# EAGLE board Board_1 (EAGLE 9.1.0)
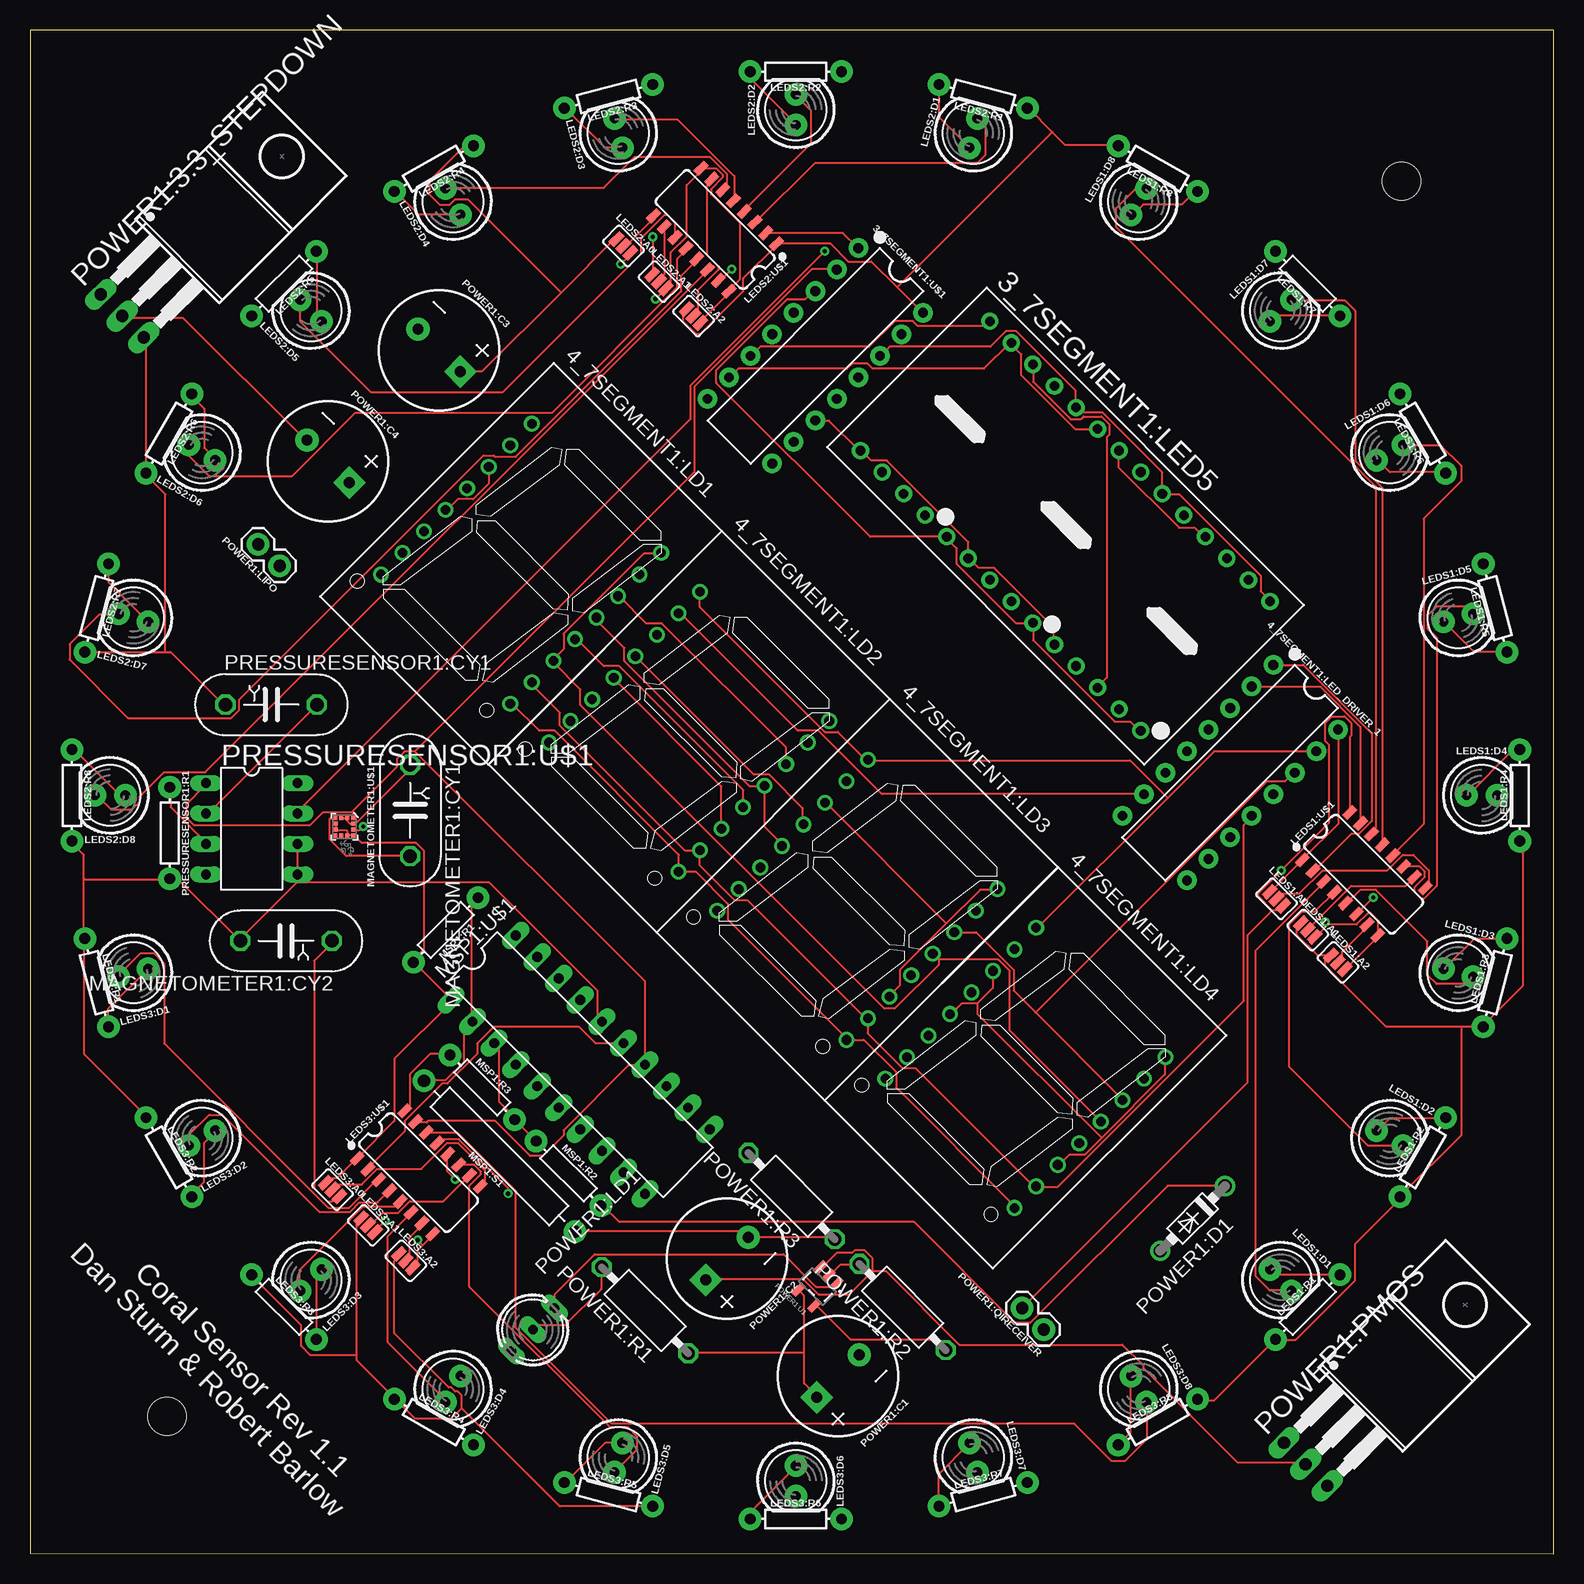
[diagram p0: board, top side]
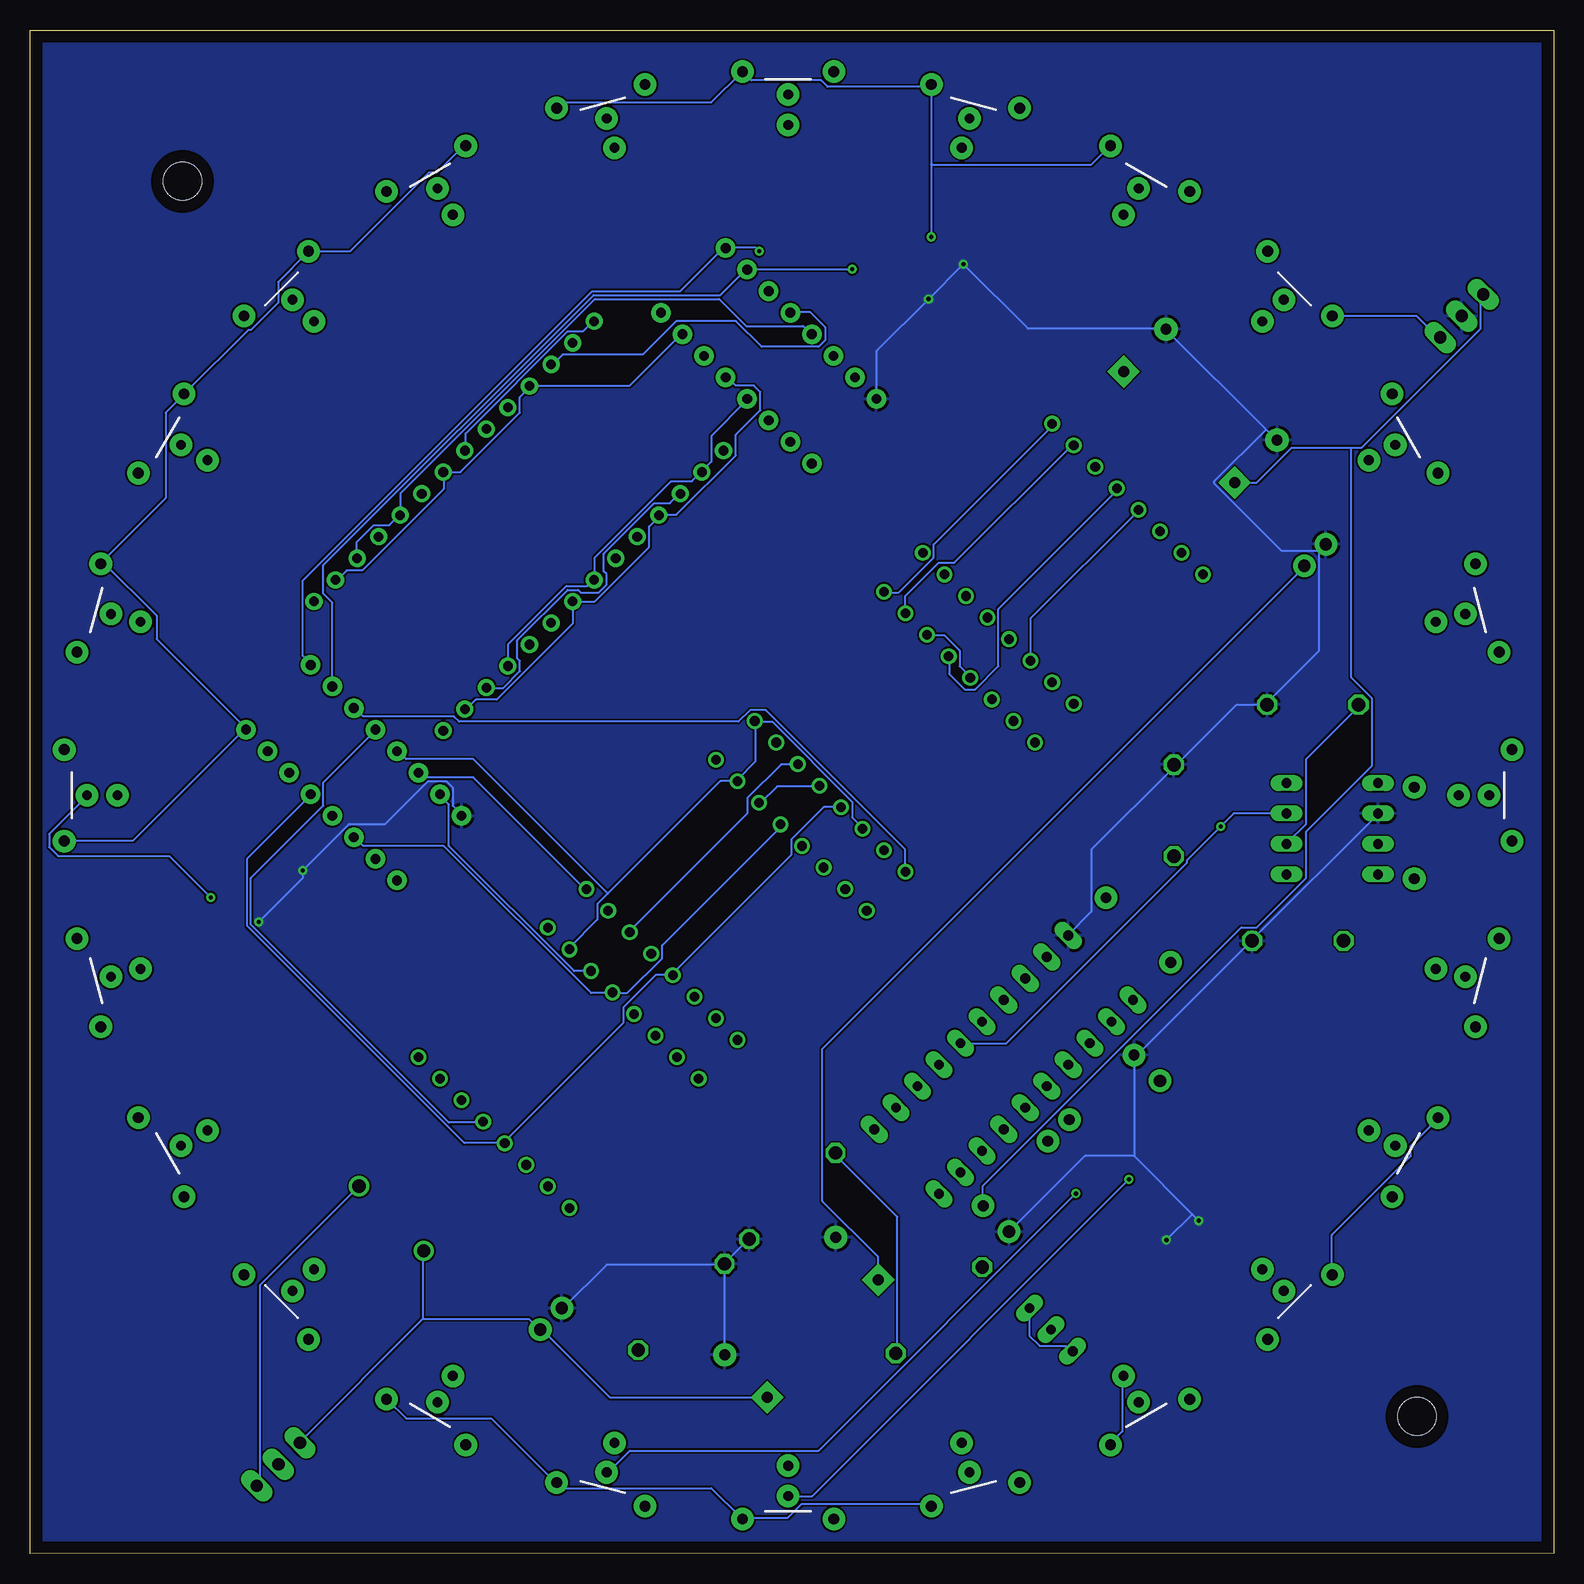
[diagram p1: board, bottom side, seen from below]

Size 127 x 127 mm. Coordinates in mm from the lower left corner, seen from the top.
Outline: 0,0 127,0 127,127 0,127 0,0
Copper layers (1*16): Top 0.035mm / dielectric 1.5mm / Bottom 0.035mm
Design rules "default *": minimum track width 6mil, minimum drill 0.35mm, track to track 6mil, track to pad 6mil, pad to pad 5mil, via to via 6mil, smd to smd 6mil, copper to edge 40mil, drill to drill 6mil, minimum pad ring 10mil, minimum via ring 8mil, stop-mask expansion 4mil, vias tented up to drill 0mil, thermal gap 10mil
Holes 3.17 mm at 114.29,114.39 11.42,11.43

## Footprints (pad centres in the part's own frame; a part is rotated, then mirrored left to right if it is on the bottom)
BA/BC56 = drill 0.8 pad 1.422: 1 -16.51,-7.62; 2 -13.97,-7.62; 3 -11.43,-7.62; 4 -8.89,-7.62; 5 -6.35,-7.62; 6 -3.81,-7.62; 7 -1.27,-7.62; 8 1.27,-7.62; 9 3.81,-7.62; 10 6.35,-7.62; 11 8.89,-7.62; 12 11.43,-7.62; 13 13.97,-7.62; 14 16.51,-7.62; 15 16.51,7.62; 16 13.97,7.62; 17 11.43,7.62; 18 8.89,7.62; 19 6.35,7.62; 20 3.81,7.62; 21 1.27,7.62; 22 -1.27,7.62; 23 -3.81,7.62; 24 -6.35,7.62; 25 -8.89,7.62; 26 -11.43,7.62; 27 -13.97,7.62; 28 -16.51,7.62
DIP16 = drill 0.813 pad 1.626: 1 -8.89,-3.81; 2 -6.35,-3.81; 3 -3.81,-3.81; 4 -1.27,-3.81; 5 1.27,-3.81; 6 3.81,-3.81; 7 6.35,-3.81; 8 8.89,-3.81; 9 8.89,3.81; 10 6.35,3.81; 11 3.81,3.81; 12 1.27,3.81; 13 -1.27,3.81; 14 -3.81,3.81; 15 -6.35,3.81; 16 -8.89,3.81
SA08 = drill 0.8 pad 1.27: 1 -7.62,8.89; 2 -7.62,6.35; 3 -7.62,3.81; 4 -7.62,1.27; 5 -7.62,-1.27; 6 -7.62,-3.81; 7 -7.62,-6.35; 8 -7.62,-8.89; 9 7.62,-8.89; 10 7.62,-6.35; 11 7.62,-3.81; 12 7.62,-1.27; 13 7.62,1.27; 14 7.62,3.81; 15 7.62,6.35; 16 7.62,8.89
SMT-JUMPER_3_NO_SILK = smd 0.635 x 1.27: 1 -0.813,0; 2 0,0; 3 0.813,0
LED_5MM = drill 0.813 pad 1.88: A -1.27,0; K 1.27,0
AXIAL-0.3 = drill 0.9 pad 1.88: P$1 -3.81,0; P$2 3.81,0
SO16 = smd 0.6 x 1.2: 1 -4.445,-2.8; 2 -3.175,-2.8; 3 -1.905,-2.8; 4 -0.635,-2.8; 5 0.635,-2.8; 6 1.905,-2.8; 7 3.175,-2.8; 8 4.445,-2.8; 9 4.445,2.8; 10 3.175,2.8; 11 1.905,2.8; 12 0.635,2.8; 13 -0.635,2.8; 14 -1.905,2.8; 15 -3.175,2.8; 16 -4.445,2.8
YC7B5 = drill 1.118 octagon: 1 -3.81,0; 2 3.81,0
LGA-12 = smd 0.375 x 0.35: 1 -0.75,0.75; 2 -0.75,0.25; 3 -0.75,-0.25; 4 -0.75,-0.75; 7 0.75,-0.75; 8 0.75,-0.25; 9 0.75,0.25; 10 0.75,0.75 | smd 0.35 x 0.375: 5 -0.25,-0.75; 6 0.25,-0.75; 11 0.25,0.75; 12 -0.25,0.75
REED_SWITCH_GLASS = drill 1.016 pad 1.88: P$1 -8.89,0; P$2 8.89,0
DIL20 = drill 0.813 long: 1 -11.43,-3.81; 2 -8.89,-3.81; 3 -6.35,-3.81; 4 -3.81,-3.81; 5 -1.27,-3.81; 6 1.27,-3.81; 7 3.81,-3.81; 8 6.35,-3.81; 9 8.89,-3.81; 10 11.43,-3.81; 11 11.43,3.81; 12 8.89,3.81; 13 6.35,3.81; 14 3.81,3.81; 15 1.27,3.81; 16 -1.27,3.81; 17 -3.81,3.81; 18 -6.35,3.81; 19 -8.89,3.81; 20 -11.43,3.81
T03B = drill 1.016 long: 1 -2.54,-11.43; 2 0,-11.43; 3 2.54,-11.43
CPOL-RADIAL-5MM-10MM = drill 0.9 pad 1.93 square: + 2.5,0 | drill 0.9 pad 1.93: - -2.5,0
DO41-7.6 = drill 1.1 pad 1.7: A 3.81,0; C -3.81,0
DUOLED-A-5MM = drill 0.813 long: A 0,0; CR 2.54,0; CX -2.54,0
1X02 = drill 1.016 pad 1.88: 1 0,0; 2 2.54,0
VMTA55 = drill 1.1 octagon: 1 -5.08,0; 2 5.08,0
SOT23-5 = smd 0.55 x 1.2: 1 -0.95,-1.3; 2 0,-1.3; 3 0.95,-1.3; 4 0.95,1.3; 5 -0.95,1.3
DIL8 = drill 0.813 long: 1 -3.81,-3.81; 2 -1.27,-3.81; 3 1.27,-3.81; 4 3.81,-3.81; 5 3.81,3.81; 6 1.27,3.81; 7 -1.27,3.81; 8 -3.81,3.81

## Placement (x,y rotation side)
3_7SEGMENT1:LED5  BA56-11EWA  [BA/BC56]  86.27,85.65 315 top
3_7SEGMENT1:U$1  MAX6958BAPE+  [DIP16]  65.44,99.84 225 top
4_7SEGMENT1:LD1  SA08-11  [SA08]  40.92,82.51 315 top
4_7SEGMENT1:LD2  SA08-11  [SA08]  54.93,68.5 315 top
4_7SEGMENT1:LD3  SA08-11  [SA08]  68.94,54.49 315 top
4_7SEGMENT1:LD4  SA08-11  [SA08]  82.95,40.48 315 top
4_7SEGMENT1:LED_DRIVER_1  [DIP16]  100.01,65.09 225 top
LEDS1:A0  [SMT-JUMPER_3_NO_SILK]  103.87,54.58 315 top
LEDS1:A1  [SMT-JUMPER_3_NO_SILK]  106.48,51.98 315 top
LEDS1:A2  [SMT-JUMPER_3_NO_SILK]  108.99,49.28 315 top
LEDS1:D1  [LED_5MM]  104.23,22.79 315 top
LEDS1:D2  [LED_5MM]  113.32,34.63 330 top
LEDS1:D3  [LED_5MM]  119.02,48.41 345 top
LEDS1:D4  [LED_5MM]  120.97,63.2 0 top
LEDS1:D5  [LED_5MM]  119.02,77.99 15 top
LEDS1:D6  [LED_5MM]  113.32,91.78 30 top
LEDS1:D7  [LED_5MM]  104.23,103.61 45 top
LEDS1:D8  [LED_5MM]  92.4,112.69 60 top
LEDS1:R1  100  [AXIAL-0.3]  106.48,20.55 45 top
LEDS1:R2  100  [AXIAL-0.3]  116.07,33.04 60 top
LEDS1:R3  100  [AXIAL-0.3]  122.09,47.59 75 top
LEDS1:R4  100  [AXIAL-0.3]  124.15,63.2 90 top
LEDS1:R5  100  [AXIAL-0.3]  122.09,78.81 105 top
LEDS1:R6  100  [AXIAL-0.3]  116.07,93.36 120 top
LEDS1:R7  100  [AXIAL-0.3]  106.48,105.86 135 top
LEDS1:R8  100  [AXIAL-0.3]  93.98,115.44 150 top
LEDS1:U$1  TPIC2810D  [SO16]  111.15,56.65 315 top
LEDS2:A0  [SMT-JUMPER_3_NO_SILK]  49.45,109 315 top
LEDS2:A1  [SMT-JUMPER_3_NO_SILK]  52.42,106.04 315 top
LEDS2:A2  [SMT-JUMPER_3_NO_SILK]  55.29,103.16 315 top
LEDS2:D1  [LED_5MM]  78.61,118.4 75 top
LEDS2:D2  [LED_5MM]  63.82,120.35 90 top
LEDS2:D3  [LED_5MM]  49.03,118.4 105 top
LEDS2:D4  [LED_5MM]  35.25,112.69 120 top
LEDS2:D5  [LED_5MM]  23.41,103.61 135 top
LEDS2:D6  [LED_5MM]  14.33,91.78 150 top
LEDS2:D7  [LED_5MM]  8.62,77.99 165 top
LEDS2:D8  [LED_5MM]  6.67,63.2 180 top
LEDS2:R1  100  [AXIAL-0.3]  79.44,121.47 165 top
LEDS2:R2  100  [AXIAL-0.3]  63.82,123.53 180 top
LEDS2:R3  100  [AXIAL-0.3]  48.21,121.47 195 top
LEDS2:R4  100  [AXIAL-0.3]  33.66,115.44 210 top
LEDS2:R5  100  [AXIAL-0.3]  21.17,105.86 225 top
LEDS2:R6  100  [AXIAL-0.3]  11.58,93.36 240 top
LEDS2:R7  100  [AXIAL-0.3]  5.55,78.81 255 top
LEDS2:R8  100  [AXIAL-0.3]  3.5,63.2 270 top
LEDS2:U$1  TPIC2810D  [SO16]  57.09,110.35 135 top
LEDS3:A0  [SMT-JUMPER_3_NO_SILK]  25.21,30.33 315 top
LEDS3:A1  [SMT-JUMPER_3_NO_SILK]  28.17,27.37 315 top
LEDS3:A2  [SMT-JUMPER_3_NO_SILK]  31.31,24.41 315 top
LEDS3:D1  [LED_5MM]  8.62,48.41 195 top
LEDS3:D2  [LED_5MM]  14.33,34.63 210 top
LEDS3:D3  [LED_5MM]  23.41,22.79 225 top
LEDS3:D4  [LED_5MM]  35.25,13.71 240 top
LEDS3:D5  [LED_5MM]  49.03,8 255 top
LEDS3:D6  [LED_5MM]  63.82,6.05 270 top
LEDS3:D7  [LED_5MM]  78.61,8 285 top
LEDS3:D8  [LED_5MM]  92.4,13.71 300 top
LEDS3:R1  100  [AXIAL-0.3]  5.55,47.59 285 top
LEDS3:R2  100  [AXIAL-0.3]  11.58,33.04 300 top
LEDS3:R3  100  [AXIAL-0.3]  21.17,20.55 315 top
LEDS3:R4  100  [AXIAL-0.3]  33.66,10.96 330 top
LEDS3:R5  100  [AXIAL-0.3]  48.21,4.93 345 top
LEDS3:R6  100  [AXIAL-0.3]  63.82,2.88 0 top
LEDS3:R7  100  [AXIAL-0.3]  79.44,4.93 15 top
LEDS3:R8  100  [AXIAL-0.3]  93.98,10.96 30 top
LEDS3:U$1  TPIC2810D  [SO16]  32.39,31.77 315 top
MAGNETOMETER1:CY1  100nF  [YC7B5]  31.67,61.94 270 top
MAGNETOMETER1:CY2  100nF  [YC7B5]  21.35,51.08 180 top
MAGNETOMETER1:U$1  [LGA-12]  26.2,60.6 270 top
MSP1:R1  100K  [AXIAL-0.3]  34.64,51.98 225 top
MSP1:R2  560k  [AXIAL-0.3]  44.87,31.68 315 top
MSP1:R3  820k  [AXIAL-0.3]  37.69,38.86 315 top
MSP1:S1  REED_SWITCH-PTH-GLASS  [REED_SWITCH_GLASS]  39.13,33.12 135 top
MSP1:U$1  MSP430G2452IN20  [DIL20]  45.86,40.75 315 top
POWER1:3.3_STEPDOWN  MCP1826S  [T03B]  15.78,111.25 315 top
POWER1:C1  4.7uF  [CPOL-RADIAL-5MM-10MM]  67.32,14.8 225 top
POWER1:C2  4.7uF  [CPOL-RADIAL-5MM-10MM]  58.07,24.59 225 top
POWER1:C3  1uF  [CPOL-RADIAL-5MM-10MM]  34.1,100.29 315 top
POWER1:C4  1uF  [CPOL-RADIAL-5MM-10MM]  24.85,91.04 315 top
POWER1:D1  1N5817-B  [DO41-7.6]  96.88,27.92 225 top
POWER1:LD1  [DUOLED-A-5MM]  41.91,18.66 45 top
POWER1:LIPO  [1X02]  20.81,82.33 135 top
POWER1:PMOS  IPP80P03P4L-04  [T03B]  114.38,15.52 315 top
POWER1:QIRECEIVER  [1X02]  84.48,18.66 135 top
POWER1:R1  470  [VMTA55]  51.25,20.28 135 top
POWER1:R2  2K  [VMTA55]  72.71,20.55 135 top
POWER1:R3  100K  [VMTA55]  63.46,29.79 135 top
POWER1:U1  MCP73831  [SOT23-5]  65.62,22.25 135 top
PRESSURESENSOR1:CY1  [YC7B5]  20.1,70.76 0 top
PRESSURESENSOR1:R1  10k  [AXIAL-0.3]  11.65,60.06 270 top
PRESSURESENSOR1:U$1  MS5803-14BA  [DIL8]  18.47,60.42 270 top

## Library data of the parts
3_7SEGMENT1:LED5 = display-kingbright; OC_FARNELL: unknown; OC_NEWARK: unknown
3_7SEGMENT1:U$1 MAGNETOMETER1:U$1 POWER1:3.3_STEPDOWN POWER1:PMOS = LED Driver
4_7SEGMENT1:LD1-4_7SEGMENT1:LD4 POWER1:LD1 = led
4_7SEGMENT1:LED_DRIVER_1 = UnderwaterSensorProject2
LEDS1:A0 LEDS1:A1 LEDS1:A2 LEDS2:A0 LEDS2:A1 LEDS2:A2 LEDS3:A0 LEDS3:A1 LEDS3:A2 = SparkFun-Jumpers
LEDS1:D1-LEDS1:D8 LEDS2:D1-LEDS2:D8 LEDS3:D1-LEDS3:D8 = SparkFun-LED
LEDS1:R1-LEDS1:R8 LEDS2:R1-LEDS2:R8 LEDS3:R1-LEDS3:R8 MSP1:R1 = SparkFun-Resistors; PROD_ID: RES-12181
LEDS1:U$1 LEDS2:U$1 LEDS3:U$1 MSP1:U$1 PRESSURESENSOR1:U$1 = UnderwaterSensorProject
MAGNETOMETER1:CY1 MAGNETOMETER1:CY2 PRESSURESENSOR1:CY1 = rcl; SPICEPREFIX: C
MSP1:R2 MSP1:R3 = SparkFun-Resistors; PROD_ID: RES-12184
MSP1:S1 = SparkFun-Switches; PROD_ID: SWCH-09282; SF_SKU: COM-08642
POWER1:C1-POWER1:C4 = SparkFun-Capacitors; PROD_ID: CAP-09538
POWER1:D1 = diode
POWER1:LIPO POWER1:QIRECEIVER = SparkFun-Connectors
POWER1:R1-POWER1:R3 = rcl
POWER1:U1 = SparkFun-IC-Power; PROD_ID: IC-09995
PRESSURESENSOR1:R1 = SparkFun-Resistors; PROD_ID: RES-09435

## Nets
3.3V: 3_7SEGMENT1:U$1.16 4_7SEGMENT1:LED_DRIVER_1.16 LEDS1:A0.1 LEDS1:A1.1 LEDS1:A2.1 LEDS1:R1.P$1 LEDS1:R2.P$1 LEDS1:R3.P$1 LEDS1:R4.P$1 LEDS1:R5.P$2 LEDS1:R6.P$2 LEDS1:R7.P$2 LEDS1:R8.P$2 LEDS1:U$1.1 LEDS2:A0.1 LEDS2:A1.1 LEDS2:A2.1 LEDS2:R1.P$1 LEDS2:R2.P$1 LEDS2:R3.P$1 LEDS2:R4.P$1 LEDS2:R5.P$2 LEDS2:R6.P$2 LEDS2:R7.P$2 LEDS2:R8.P$2 LEDS2:U$1.1 LEDS3:A0.1 LEDS3:A1.1 LEDS3:A2.1 LEDS3:R1.P$1 LEDS3:R2.P$1 LEDS3:R3.P$1 LEDS3:R4.P$1 LEDS3:R5.P$2 LEDS3:R6.P$2 LEDS3:R7.P$2 LEDS3:R8.P$2 LEDS3:U$1.1 MAGNETOMETER1:CY2.2 MAGNETOMETER1:U$1.5 MAGNETOMETER1:U$1.6 MAGNETOMETER1:U$1.9 MAGNETOMETER1:U$1.10 MSP1:R1.P$2 MSP1:U$1.1 MSP1:U$1.16 POWER1:3.3_STEPDOWN.3 POWER1:C3.+ PRESSURESENSOR1:CY1.1 PRESSURESENSOR1:R1.P$2 PRESSURESENSOR1:U$1.5 PRESSURESENSOR1:U$1.6
3_7SEGMENT1:N$1: 3_7SEGMENT1:LED5.3 3_7SEGMENT1:LED5.12 3_7SEGMENT1:LED5.26 3_7SEGMENT1:U$1.4
3_7SEGMENT1:N$2: 3_7SEGMENT1:LED5.5 3_7SEGMENT1:LED5.9 3_7SEGMENT1:LED5.14 3_7SEGMENT1:U$1.3
3_7SEGMENT1:N$8: 3_7SEGMENT1:LED5.16 3_7SEGMENT1:LED5.21 3_7SEGMENT1:LED5.25 3_7SEGMENT1:U$1.15
3_7SEGMENT1:N$9: 3_7SEGMENT1:LED5.15 3_7SEGMENT1:LED5.20 3_7SEGMENT1:LED5.24 3_7SEGMENT1:U$1.14
3_7SEGMENT1:N$10: 3_7SEGMENT1:LED5.4 3_7SEGMENT1:LED5.8 3_7SEGMENT1:LED5.13 3_7SEGMENT1:U$1.13
3_7SEGMENT1:N$11: 3_7SEGMENT1:LED5.2 3_7SEGMENT1:LED5.7 3_7SEGMENT1:LED5.11 3_7SEGMENT1:U$1.12
3_7SEGMENT1:N$26: 3_7SEGMENT1:LED5.1 3_7SEGMENT1:LED5.6 3_7SEGMENT1:LED5.10 3_7SEGMENT1:U$1.11
3_7SEGMENT1:N$28: 3_7SEGMENT1:LED5.17 3_7SEGMENT1:LED5.19 3_7SEGMENT1:U$1.5
3_7SEGMENT1:N$29: 3_7SEGMENT1:LED5.23 3_7SEGMENT1:LED5.27 3_7SEGMENT1:U$1.7
3_7SEGMENT1:N$30: 3_7SEGMENT1:LED5.18 3_7SEGMENT1:LED5.22 3_7SEGMENT1:LED5.28 3_7SEGMENT1:U$1.6
4_7SEGMENT1:N$1: 4_7SEGMENT1:LD1.1 4_7SEGMENT1:LD2.1 4_7SEGMENT1:LD3.1 4_7SEGMENT1:LD4.1 4_7SEGMENT1:LED_DRIVER_1.15
4_7SEGMENT1:N$2: 4_7SEGMENT1:LD1.14 4_7SEGMENT1:LD2.14 4_7SEGMENT1:LD3.14 4_7SEGMENT1:LD4.14 4_7SEGMENT1:LED_DRIVER_1.14
4_7SEGMENT1:N$3: 4_7SEGMENT1:LD1.12 4_7SEGMENT1:LD2.12 4_7SEGMENT1:LD3.12 4_7SEGMENT1:LD4.12 4_7SEGMENT1:LED_DRIVER_1.13
4_7SEGMENT1:N$4: 4_7SEGMENT1:LD1.10 4_7SEGMENT1:LD2.10 4_7SEGMENT1:LD3.10 4_7SEGMENT1:LD4.10 4_7SEGMENT1:LED_DRIVER_1.12
4_7SEGMENT1:N$5: 4_7SEGMENT1:LD1.4 4_7SEGMENT1:LD2.4 4_7SEGMENT1:LD3.4 4_7SEGMENT1:LD4.4 4_7SEGMENT1:LED_DRIVER_1.11
4_7SEGMENT1:N$6: 4_7SEGMENT1:LD1.3 4_7SEGMENT1:LD1.5 4_7SEGMENT1:LD1.11 4_7SEGMENT1:LD1.16 4_7SEGMENT1:LD3.13 4_7SEGMENT1:LD4.13 4_7SEGMENT1:LED_DRIVER_1.4
4_7SEGMENT1:N$7: 4_7SEGMENT1:LD1.9 4_7SEGMENT1:LD2.9 4_7SEGMENT1:LD3.9 4_7SEGMENT1:LD4.9 4_7SEGMENT1:LED_DRIVER_1.3
4_7SEGMENT1:N$9: 4_7SEGMENT1:LD1.2 4_7SEGMENT1:LD2.2 4_7SEGMENT1:LD4.3 4_7SEGMENT1:LD4.5 4_7SEGMENT1:LD4.11 4_7SEGMENT1:LD4.16 4_7SEGMENT1:LED_DRIVER_1.7
4_7SEGMENT1:N$12: 4_7SEGMENT1:LD2.3 4_7SEGMENT1:LD2.5 4_7SEGMENT1:LD2.11 4_7SEGMENT1:LD2.16 4_7SEGMENT1:LD3.2 4_7SEGMENT1:LD4.2 4_7SEGMENT1:LED_DRIVER_1.5
4_7SEGMENT1:N$13: 4_7SEGMENT1:LD1.13 4_7SEGMENT1:LD2.13 4_7SEGMENT1:LD3.3 4_7SEGMENT1:LD3.5 4_7SEGMENT1:LD3.11 4_7SEGMENT1:LD3.16 4_7SEGMENT1:LED_DRIVER_1.6
GND: 3_7SEGMENT1:U$1.8 4_7SEGMENT1:LED_DRIVER_1.8 LEDS1:A0.3 LEDS1:A1.3 LEDS1:A2.3 LEDS1:U$1.8 LEDS1:U$1.16 LEDS2:A0.3 LEDS2:A1.3 LEDS2:A2.3 LEDS2:U$1.8 LEDS2:U$1.16 LEDS3:A0.3 LEDS3:A1.3 LEDS3:A2.3 LEDS3:U$1.8 LEDS3:U$1.16 MAGNETOMETER1:CY1.1 MAGNETOMETER1:CY2.1 MAGNETOMETER1:U$1.2 MAGNETOMETER1:U$1.3 MAGNETOMETER1:U$1.12 MSP1:R3.P$1 MSP1:S1.P$1 MSP1:U$1.20 POWER1:3.3_STEPDOWN.2 POWER1:C1.- POWER1:C2.- POWER1:C3.- POWER1:C4.- POWER1:LIPO.2 POWER1:QIRECEIVER.2 POWER1:R2.2 POWER1:R3.1 POWER1:U1.2 PRESSURESENSOR1:CY1.2 PRESSURESENSOR1:U$1.2
LEDS1:N$1: LEDS1:D1.K LEDS1:U$1.3
LEDS1:N$2: LEDS1:D2.K LEDS1:U$1.4
LEDS1:N$3: LEDS1:D3.K LEDS1:U$1.5
LEDS1:N$4: LEDS1:D4.K LEDS1:U$1.6
LEDS1:N$5: LEDS1:D5.K LEDS1:U$1.11
LEDS1:N$6: LEDS1:D6.K LEDS1:U$1.12
LEDS1:N$7: LEDS1:D7.K LEDS1:U$1.13
LEDS1:N$8: LEDS1:D8.K LEDS1:U$1.14
LEDS1:N$9: LEDS1:A2.2 LEDS1:U$1.7
LEDS1:N$10: LEDS1:A1.2 LEDS1:U$1.10
LEDS1:N$11: LEDS1:A0.2 LEDS1:U$1.9
LEDS1:N$12: LEDS1:D5.A LEDS1:R5.P$1
LEDS1:N$13: LEDS1:D6.A LEDS1:R6.P$1
LEDS1:N$14: LEDS1:D7.A LEDS1:R7.P$1
LEDS1:N$15: LEDS1:D8.A LEDS1:R8.P$1
LEDS1:N$16: LEDS1:D1.A LEDS1:R1.P$2
LEDS1:N$18: LEDS1:D2.A LEDS1:R2.P$2
LEDS1:N$19: LEDS1:D3.A LEDS1:R3.P$2
LEDS1:N$20: LEDS1:D4.A LEDS1:R4.P$2
LEDS2:N$1: LEDS2:D1.K LEDS2:U$1.3
LEDS2:N$2: LEDS2:D2.K LEDS2:U$1.4
LEDS2:N$3: LEDS2:D3.K LEDS2:U$1.5
LEDS2:N$4: LEDS2:D4.K LEDS2:U$1.6
LEDS2:N$5: LEDS2:D5.K LEDS2:U$1.11
LEDS2:N$6: LEDS2:D6.K LEDS2:U$1.12
LEDS2:N$7: LEDS2:D7.K LEDS2:U$1.13
LEDS2:N$8: LEDS2:D8.K LEDS2:U$1.14
LEDS2:N$9: LEDS2:A2.2 LEDS2:U$1.7
LEDS2:N$10: LEDS2:A1.2 LEDS2:U$1.10
LEDS2:N$11: LEDS2:A0.2 LEDS2:U$1.9
LEDS2:N$12: LEDS2:D5.A LEDS2:R5.P$1
LEDS2:N$13: LEDS2:D6.A LEDS2:R6.P$1
LEDS2:N$14: LEDS2:D7.A LEDS2:R7.P$1
LEDS2:N$15: LEDS2:D8.A LEDS2:R8.P$1
LEDS2:N$16: LEDS2:D1.A LEDS2:R1.P$2
LEDS2:N$18: LEDS2:D2.A LEDS2:R2.P$2
LEDS2:N$19: LEDS2:D3.A LEDS2:R3.P$2
LEDS2:N$20: LEDS2:D4.A LEDS2:R4.P$2
LEDS3:N$1: LEDS3:D1.K LEDS3:U$1.3
LEDS3:N$2: LEDS3:D2.K LEDS3:U$1.4
LEDS3:N$3: LEDS3:D3.K LEDS3:U$1.5
LEDS3:N$4: LEDS3:D4.K LEDS3:U$1.6
LEDS3:N$5: LEDS3:D5.K LEDS3:U$1.11
LEDS3:N$6: LEDS3:D6.K LEDS3:U$1.12
LEDS3:N$7: LEDS3:D7.K LEDS3:U$1.13
LEDS3:N$8: LEDS3:D8.K LEDS3:U$1.14
LEDS3:N$9: LEDS3:A2.2 LEDS3:U$1.7
LEDS3:N$10: LEDS3:A1.2 LEDS3:U$1.10
LEDS3:N$11: LEDS3:A0.2 LEDS3:U$1.9
LEDS3:N$12: LEDS3:D5.A LEDS3:R5.P$1
LEDS3:N$13: LEDS3:D6.A LEDS3:R6.P$1
LEDS3:N$14: LEDS3:D7.A LEDS3:R7.P$1
LEDS3:N$15: LEDS3:D8.A LEDS3:R8.P$1
LEDS3:N$16: LEDS3:D1.A LEDS3:R1.P$2
LEDS3:N$18: LEDS3:D2.A LEDS3:R2.P$2
LEDS3:N$19: LEDS3:D3.A LEDS3:R3.P$2
LEDS3:N$20: LEDS3:D4.A LEDS3:R4.P$2
MAGNETOMETER1:N$3: MAGNETOMETER1:CY1.2 MAGNETOMETER1:U$1.4
MSP1:N$1: MSP1:R1.P$1 MSP1:S1.P$2 MSP1:U$1.2
MSP1:N$2: MSP1:R2.P$1 MSP1:R3.P$2 MSP1:U$1.3
N$1: MSP1:R2.P$2 POWER1:3.3_STEPDOWN.1 POWER1:C4.+ POWER1:D1.C POWER1:PMOS.3
POWER1:N$2: POWER1:C2.+ POWER1:LIPO.1 POWER1:PMOS.2 POWER1:U1.3
POWER1:N$3: POWER1:LD1.CR POWER1:LD1.CX POWER1:U1.1
POWER1:N$4: POWER1:C1.+ POWER1:D1.A POWER1:PMOS.1 POWER1:QIRECEIVER.1 POWER1:R1.1 POWER1:R3.2 POWER1:U1.4
POWER1:N$6: POWER1:R2.1 POWER1:U1.5
POWER1:N$7: POWER1:LD1.A POWER1:R1.2
PRESSURESENSOR1:N$1: PRESSURESENSOR1:R1.P$1 PRESSURESENSOR1:U$1.3
SCL: 3_7SEGMENT1:U$1.2 4_7SEGMENT1:LED_DRIVER_1.2 LEDS1:U$1.15 LEDS2:U$1.15 LEDS3:U$1.15 MAGNETOMETER1:U$1.1 MSP1:U$1.14 PRESSURESENSOR1:U$1.1
SDA: 3_7SEGMENT1:U$1.1 4_7SEGMENT1:LED_DRIVER_1.1 LEDS1:U$1.2 LEDS2:U$1.2 LEDS3:U$1.2 MAGNETOMETER1:U$1.11 MSP1:U$1.15 PRESSURESENSOR1:U$1.7

## Tracks (layer width: path | path; a pad name or v marks a point on that pad's centre or on a via)
3.3V  (via drill 0.35)
  Top 0.152: LEDS3:A0.1 24.75,30.87 25.18,31.3 25.61,31.3 27.23,32.92 LEDS3:U$1.1 27.34,33.02 30.36,36.04 30.36,41.21 35.1,45.96 MSP1:U$1.1 35.1,46.17 31.97,49.3 MSP1:R1.P$2 31.86,49.4 32.83,50.37 32.83,55.98 | 25.51,60.29 25.51,60.72 MAGNETOMETER1:U$1.5 | 25.51,60.29 MAGNETOMETER1:U$1.6 25.51,60.29 | 25.51,60.29 26.37,60.29 26.48,60.18 26.48,59.97 MAGNETOMETER1:U$1.9 26.58,59.86 26.8,59.86 MAGNETOMETER1:U$1.10 27.01,59.86 27.66,59.21 32.19,59.21 32.83,58.56 32.83,55.98 | 32.83,55.98 38.22,55.98 47.27,46.93 47.27,44.77 47.6,44.45 MSP1:U$1.16 | 27.23,16.54 27.23,16.11 30.36,12.98 LEDS3:R4.P$1 30.46,12.87 32.08,11.26 35.1,11.26 35.96,12.12 | 27.23,16.54 27.23,27.53 27.55,27.85 LEDS3:A1.1 | 35.96,12.12 35.96,13.2 35.64,13.52 35.42,13.52 35.1,13.84 34.88,13.84 30.36,18.37 30.36,24.4 30.79,24.83 LEDS3:A2.1 | 27.23,16.54 23.35,16.54 22.6,17.29 22.6,19.02 18.5,23.11 LEDS3:R3.P$1 | POWER1:3.3_STEPDOWN.3 9.67,101.35 9.67,90.14 LEDS2:R6.P$2 9.67,89.92 11.28,88.31 11.28,75.16 | 11.28,75.16 4.6,75.16 LEDS2:R7.P$2 | 11.28,75.16 11.71,75.16 16.13,70.74 PRESSURESENSOR1:CY1.1 | PRESSURESENSOR1:U$1.5 22.27,56.62 22.27,59 PRESSURESENSOR1:U$1.6 | 22.27,55.98 17.53,51.24 MAGNETOMETER1:CY2.2 17.42,51.13 12.36,56.19 11.71,56.19 PRESSURESENSOR1:R1.P$2 11.5,56.19 4.6,56.19 4.49,56.3 | 22.27,55.98 22.27,56.41 PRESSURESENSOR1:U$1.5 | 4.49,56.3 4.49,51.34 LEDS3:R1.P$1 4.49,51.13 4.49,41.65 9.67,36.47 LEDS3:R2.P$1 | 4.49,56.3 4.49,58.24 3.52,59.21 LEDS2:R8.P$2 | 22.27,55.98 32.83,55.98 | 22.27,55.98 PRESSURESENSOR1:U$1.5 | LEDS1:A0.1 103.42,55.22 106.01,57.81 LEDS1:U$1.1 106.11,57.92 109.02,60.83 109.02,68.59 4_7SEGMENT1:LED_DRIVER_1.16
  Top 0.152: 107.94,49.84 108.38,49.84 LEDS1:A2.1 | 107.94,49.84 107.3,49.84 105.57,51.56 105.57,52.21 105.9,52.53 LEDS1:A1.1 | 107.94,49.84 107.94,48.97 113.01,43.91 119.26,43.91 | 119.26,43.91 120.98,43.91 LEDS1:R3.P$1 121.09,44.02 124.43,47.36 124.43,59 124.11,59.32 LEDS1:R4.P$1 | 119.26,43.91 119.26,34.86 114.2,29.79 LEDS1:R2.P$1 114.2,29.58 110.42,25.8 110.42,22.79 105.47,17.83 103.96,17.83 LEDS1:R1.P$1 103.74,17.83 98.68,12.77 97.38,12.77 LEDS3:R8.P$2 | 44.26,105.12 37.68,98.54 35.96,98.54 POWER1:C3.+ | 44.26,105.12 48.78,109.64 LEDS2:A0.1 | v51.91,109.75 51.91,106.73 LEDS2:A1.1 | 44.26,105.12 36.5,112.88 35.42,112.88 34.99,112.45 34.13,112.45 33.27,113.31 33.27,114.39 36.17,117.3 36.82,117.3 LEDS2:R4.P$1 | LEDS2:A2.1 54.71,103.72 54.39,103.39 54.39,102.75 55.46,101.67 55.9,101.67 59.45,105.23 59.45,106.3 62.25,109.11 LEDS2:U$1.1 62.36,109.21 66.67,109.21 68.18,107.7 70.12,107.7 72.28,105.55 | 72.28,105.55 74.32,103.5 3_7SEGMENT1:U$1.16 | 85.21,118.48 86.28,117.4 90.6,117.4 LEDS1:R8.P$2 | 85.21,118.48 83.27,120.42 LEDS2:R1.P$1 | 85.21,118.48 72.28,105.55 | 35.96,12.12 44.15,3.93 51.69,3.93 LEDS3:R5.P$2
  Bottom 0.152: LEDS3:R2.P$1 9.67,36.26 11.93,33.99 11.93,33.13 18.5,26.56 18.5,23.33 LEDS3:R3.P$1 | POWER1:3.3_STEPDOWN.3 9.67,101.35 11.5,103.18 18.39,103.18 LEDS2:R5.P$2 | PRESSURESENSOR1:CY1.1 16.24,70.63 20.66,66.22 20.66,60.83 22.27,59.21 PRESSURESENSOR1:U$1.6 | LEDS1:R4.P$1 124,59.43 118.4,59.43 109.13,68.69 4_7SEGMENT1:LED_DRIVER_1.16 109.02,68.8 116.46,76.24 116.46,78.18 120.98,82.7 | LEDS3:R5.P$2 51.91,3.93 52.12,4.14 62.68,4.14 63.87,2.96 67.53,2.96 LEDS3:R6.P$2 67.75,2.96 70.23,5.44 82.51,5.44 83.05,5.98 LEDS3:R7.P$2 83.27,5.98 88.55,11.26 95.66,11.26 97.17,12.77 LEDS3:R8.P$2 | 51.91,122.25 51.91,122.47 LEDS2:R3.P$1 51.91,122.25 | 51.91,122.25 51.91,115.79 | 51.91,115.79 v51.91,109.75 | 51.91,115.79 38.55,115.79 37.04,117.3 LEDS2:R4.P$1 | 51.91,122.25 60.53,122.25 61.07,122.79 66.89,122.79 67.53,123.44 LEDS2:R2.P$1 67.75,123.44 70.23,120.96 82.51,120.96 83.05,120.42 LEDS2:R1.P$1 | 120.98,82.7 115.7,87.98 115.7,95.1 114.2,96.61 LEDS1:R6.P$2 114.09,96.71 108.81,101.99 108.59,101.99 106.33,104.26 106.33,105.98 103.85,108.46 LEDS1:R7.P$2 103.74,108.57 100.29,108.57 93.72,115.14 93.07,115.14 90.81,117.4 LEDS1:R8.P$2 | 120.98,82.7 121.09,82.6 LEDS1:R5.P$2 120.98,82.7
3_7SEGMENT1:N$1
  Top 0.152: 3_7SEGMENT1:LED5.12 88.98,72.25 89.73,73 89.73,93.05 89.95,93.26 89.95,94.13 89.3,94.77 87.79,94.77 87.58,94.56 86.72,94.56 83.59,97.68 83.59,98.98 3_7SEGMENT1:LED5.26
  Bottom 0.152: 3_7SEGMENT1:LED5.3 72.92,88.31 73.68,87.55 74.97,87.55 79.17,83.35 79.17,81.84 78.96,81.63 78.96,80.76 79.6,80.12 81.11,80.12 81.33,80.33 82.19,80.33 86.39,76.13 86.39,74.62 86.18,74.41 86.18,73.54 87.58,72.14 88.87,72.14 3_7SEGMENT1:LED5.12 | 3_7SEGMENT1:LED5.26 83.48,99.08 82.62,99.95 75.94,99.95 73.14,102.75 68.18,102.75 66.03,100.59 61.28,100.59 60.74,101.13 60.74,102.21 62.04,103.5 63.55,103.5 3_7SEGMENT1:U$1.4
3_7SEGMENT1:N$2
  Top 0.152: 3_7SEGMENT1:LED5.14 92.43,68.59 91.67,69.34 90.38,69.34 83.59,76.13 83.59,77.42 3_7SEGMENT1:LED5.9 83.48,77.53 82.19,77.53 77.23,82.49 77.23,83.78 76.37,84.64 3_7SEGMENT1:LED5.5 76.26,84.75 70.01,84.75 57.19,97.57 57.19,98.65 63.12,104.58 64.62,104.58 65.27,105.23 3_7SEGMENT1:U$1.3
3_7SEGMENT1:N$8
  Bottom 0.152: 3_7SEGMENT1:LED5.16 101.37,81.19 100.62,81.95 99.32,81.95 92.53,88.74 92.53,90.03 3_7SEGMENT1:LED5.21 92.43,90.14 91.13,90.14 86.18,95.1 86.18,96.39 85.31,97.25 3_7SEGMENT1:LED5.25 85.21,97.36 77.02,97.36 72.71,101.67 3_7SEGMENT1:U$1.15
3_7SEGMENT1:N$9
  Top 0.152: 3_7SEGMENT1:LED5.15 103.31,79.47 102.56,80.23 102.56,81.52 95.77,88.31 94.47,88.31 3_7SEGMENT1:LED5.20 94.37,88.42 94.37,90.14 89.41,95.1 87.69,95.1 87.25,95.53 3_7SEGMENT1:LED5.24 87.15,95.64 87.15,96.93 82.19,101.89 81.33,101.89 80.03,100.59 71.63,100.59 70.87,99.84 3_7SEGMENT1:U$1.14
3_7SEGMENT1:N$10
  Bottom 0.152: 3_7SEGMENT1:LED5.13 90.6,70.42 89.84,71.17 88.12,71.17 81.76,77.53 81.76,79.26 3_7SEGMENT1:LED5.8 81.65,79.36 79.93,79.36 75.4,83.89 75.4,85.61 74.54,86.48 3_7SEGMENT1:LED5.4 74.43,86.58 73.14,86.58 68.18,91.54 68.18,93.26 66.13,95.31 66.13,96.82 66.67,97.36 68.18,97.36 68.93,98.11 3_7SEGMENT1:U$1.13
3_7SEGMENT1:N$11
  Bottom 0.152: 3_7SEGMENT1:U$1.12 67.21,96.17 70.23,93.16 70.23,91 70.98,90.25 3_7SEGMENT1:LED5.2 71.09,90.14 71.84,89.38 73.57,89.38 79.93,83.03 79.93,81.3 3_7SEGMENT1:LED5.7 80.03,81.19 80.57,80.66 82.3,80.66 87.15,75.81 87.15,74.08 3_7SEGMENT1:LED5.11
3_7SEGMENT1:N$26
  Top 0.152: 3_7SEGMENT1:U$1.11 65.49,94.45 66.56,94.45 69.04,91.97 3_7SEGMENT1:LED5.1 69.26,91.97 70.12,91.11 71.41,91.11 78.2,84.32 78.2,83.03 3_7SEGMENT1:LED5.6 78.31,82.92 79.06,82.16 80.36,82.16 85.31,77.21 85.31,75.91 3_7SEGMENT1:LED5.10
3_7SEGMENT1:N$28
  Bottom 0.152: 3_7SEGMENT1:LED5.17 99.75,83.03 99.75,84.32 98.35,85.72 97.06,85.72 96.2,86.58 3_7SEGMENT1:LED5.19 96.09,86.69 96.09,88.42 79.93,104.58 69.58,104.58 67.32,102.32 62.58,102.32 61.93,101.67 3_7SEGMENT1:U$1.5
3_7SEGMENT1:N$29
  Top 0.152: 3_7SEGMENT1:LED5.23 88.87,93.7 87.15,93.7 82.62,98.22 82.62,99.95 81.76,100.81 3_7SEGMENT1:LED5.27 81.65,100.92 79.5,98.76 70.23,98.76 69.8,99.19 68.5,99.19 68.07,98.76 59.02,98.76 58.37,98.11 3_7SEGMENT1:U$1.7
3_7SEGMENT1:N$30
  Top 0.152: 3_7SEGMENT1:LED5.18 97.82,84.75 97.06,85.51 95.77,85.51 90.7,90.57 90.7,91.86 3_7SEGMENT1:LED5.22 | 3_7SEGMENT1:U$1.6 60.1,99.84 60.85,100.59 69.9,100.59 72.06,102.75 73.57,102.75 74,102.32 79.39,102.32 79.82,102.75 3_7SEGMENT1:LED5.28
  Bottom 0.152: 3_7SEGMENT1:LED5.28 80.03,102.75 80.9,101.89 82.19,101.89 90.7,93.37 90.7,92.08 3_7SEGMENT1:LED5.22
4_7SEGMENT1:N$1
  Top 0.152: 94.8,62.98 98.68,66.86 107.08,66.86 4_7SEGMENT1:LED_DRIVER_1.15 | 94.8,62.98 83.91,52.1 4_7SEGMENT1:LD4.1 | 4_7SEGMENT1:LD2.1 55.79,80.01 55.79,78.93 66.24,68.48 67.32,68.48 69.69,66.11 4_7SEGMENT1:LD3.1 69.9,66.11 91.67,66.11 94.8,62.98
  Bottom 0.152: 4_7SEGMENT1:LD1.1 41.78,94.02 51.69,84.1 51.69,83.03 54.6,80.12 55.68,80.12 4_7SEGMENT1:LD2.1
4_7SEGMENT1:N$2
  Top 0.152: 4_7SEGMENT1:LD1.14 49.11,79.79 51.37,77.53 52.66,77.53 63.01,67.19 63.01,65.89 4_7SEGMENT1:LD2.14 | 83.81,45.09 81.97,46.93 81.97,48.65 78.85,51.78 77.12,51.78 4_7SEGMENT1:LD3.14 | 83.81,45.09 91.03,37.87 4_7SEGMENT1:LD4.14 | 83.81,45.09 103.1,64.38 104.6,64.38 105.25,65.03 4_7SEGMENT1:LED_DRIVER_1.14
  Bottom 0.152: 4_7SEGMENT1:LD3.14 77.02,51.88 67.21,61.69 67.21,62.98 64.41,65.78 63.12,65.78 4_7SEGMENT1:LD2.14
4_7SEGMENT1:N$3
  Top 0.152: 4_7SEGMENT1:LD1.12 45.55,76.24 47.81,73.97 49.11,73.97 59.45,63.63 59.45,62.34 4_7SEGMENT1:LD2.12
  Bottom 0.152: 4_7SEGMENT1:LD2.12 59.56,62.23 60.85,62.23 63.55,59.53 63.55,58.24 73.46,48.33 4_7SEGMENT1:LD3.12 73.57,48.22 74.86,48.22 77.56,45.53 77.56,44.23 87.47,34.32 4_7SEGMENT1:LD4.12 87.58,34.21 90.81,34.21 108.91,52.31 108.91,57.92 103.63,63.2 4_7SEGMENT1:LED_DRIVER_1.13
4_7SEGMENT1:N$4
  Top 0.152: 4_7SEGMENT1:LD1.10 41.78,72.47 44.15,70.1 44.15,69.02 54.6,58.56 55.68,58.56 4_7SEGMENT1:LD2.10 55.79,58.46 55.79,57.38 58.7,54.47 59.77,54.47 69.69,44.56 4_7SEGMENT1:LD3.10 69.8,44.45 69.8,43.37 72.71,40.46 73.78,40.46 83.7,30.55 4_7SEGMENT1:LD4.10 83.91,30.55 85.64,30.55 101.16,46.06 101.16,60.72 101.8,61.37 4_7SEGMENT1:LED_DRIVER_1.12
4_7SEGMENT1:N$5
  Top 0.152: 4_7SEGMENT1:LD2.4 50.51,74.73 60.31,64.92 61.61,64.92 64.41,62.12 64.41,60.83 4_7SEGMENT1:LD3.4
  Bottom 0.152: 4_7SEGMENT1:LD1.4 36.39,88.63 46.3,78.72 46.3,73.97 48.24,72.04 49.11,72.04 50.4,73.33 50.4,74.62 4_7SEGMENT1:LD2.4 | 4_7SEGMENT1:LD3.4 64.41,60.61 74.32,50.7 74.32,49.62 77.23,46.71 78.31,46.71 4_7SEGMENT1:LD4.4 78.53,46.71 80.25,46.71 92.53,59 99.22,59 99.86,59.64 4_7SEGMENT1:LED_DRIVER_1.11
4_7SEGMENT1:N$6
  Top 0.152: 4_7SEGMENT1:LD1.5 34.77,87.01 35.64,87.88 36.93,87.88 38.22,89.17 38.22,90.46 4_7SEGMENT1:LD1.3 | 4_7SEGMENT1:LD1.16 52.45,83.35 51.15,83.35 44.47,76.67 44.47,75.38 43.61,74.51 4_7SEGMENT1:LD1.11 43.61,74.3 45.87,72.04 45.87,70.74 71.2,45.42 72.06,45.42 75.72,49.08 75.72,49.51 | 75.72,49.51 75.29,49.94 4_7SEGMENT1:LD3.13 | 75.72,49.51 80.68,49.51 81.65,48.54 81.65,43.59 89.19,36.04 4_7SEGMENT1:LD4.13
  Bottom 0.152: 4_7SEGMENT1:LD1.5 34.67,86.91 43.61,77.96 43.61,74.51 4_7SEGMENT1:LD1.11 | 4_7SEGMENT1:LED_DRIVER_1.4 98.25,68.59 102.56,64.28 102.56,62.34 108.59,56.3 108.59,52.42 92.1,35.93 89.3,35.93 4_7SEGMENT1:LD4.13
4_7SEGMENT1:N$7
  Top 0.152: 4_7SEGMENT1:LD1.9 40.16,70.85 42.42,68.59 43.72,68.59 54.06,58.24 54.06,56.95 4_7SEGMENT1:LD2.9 54.17,56.84 55.46,56.84 58.16,54.15 58.16,52.85 68.07,42.94 4_7SEGMENT1:LD3.9 68.18,42.83 69.47,42.83 72.17,40.14 72.17,38.84 82.08,28.93 4_7SEGMENT1:LD4.9
  Bottom 0.152: 4_7SEGMENT1:LED_DRIVER_1.3 99.86,70.42 99.22,69.77 91.67,69.77 91.24,69.34 67.96,69.34 66.99,70.31 65.7,70.31 54.06,58.67 54.06,56.95 4_7SEGMENT1:LD2.9
4_7SEGMENT1:N$9
  Top 0.152: 89.3,34.64 94.58,39.92 94.58,41.21 4_7SEGMENT1:LD4.16 | 89.3,34.64 87.9,33.24 86.61,33.24 85.75,32.38 4_7SEGMENT1:LD4.11 | 78.96,45.85 77.66,45.85 76.8,44.99 4_7SEGMENT1:LD4.5 | 78.96,45.85 80.25,47.14 80.25,48.43 4_7SEGMENT1:LD4.3 | 89.3,34.64 78.96,44.99 78.96,45.85 | 4_7SEGMENT1:LD2.2 54.17,78.39 63.98,68.59 65.7,68.59 70.98,63.31 92.75,63.31 4_7SEGMENT1:LED_DRIVER_1.7
  Bottom 0.152: 4_7SEGMENT1:LD1.2 40.16,92.4 49.97,82.6 51.26,82.6 54.06,79.79 54.06,78.5 4_7SEGMENT1:LD2.2 | 4_7SEGMENT1:LED_DRIVER_1.7 92.86,63.2 92.1,62.44 92.1,59 81.65,48.54 80.36,48.54 4_7SEGMENT1:LD4.3
4_7SEGMENT1:N$12
  Top 0.152: 4_7SEGMENT1:LD2.5 48.68,72.9 57.62,63.95 57.62,60.5 4_7SEGMENT1:LD2.11
  Bottom 0.152: 4_7SEGMENT1:LD2.5 48.68,73.11 49.54,73.97 49.54,75.27 50.83,76.56 52.12,76.56 4_7SEGMENT1:LD2.3 | 4_7SEGMENT1:LD2.11 57.62,60.5 58.48,61.37 58.48,62.66 65.16,69.34 66.46,69.34 4_7SEGMENT1:LD2.16 66.56,69.23 66.56,66 68.07,64.49 4_7SEGMENT1:LD3.2 68.18,64.38 69.47,64.38 78.85,55.01 | 78.85,55.01 79.71,54.15 79.71,52.85 82.08,50.48 4_7SEGMENT1:LD4.2 | 78.85,55.01 90.06,66.22 95.66,66.22 96.31,66.86 4_7SEGMENT1:LED_DRIVER_1.5
4_7SEGMENT1:N$13
  Top 0.152: 4_7SEGMENT1:LD1.13 47.17,77.85 49.54,75.48 49.54,74.41 59.99,63.95 61.07,63.95 4_7SEGMENT1:LD2.13 61.18,63.85 61.18,60.61 62.68,59.1 4_7SEGMENT1:LD3.5 | 76.37,52.53 79.17,55.33 80.47,55.33 4_7SEGMENT1:LD3.16 | 76.37,52.53 72.49,48.65 72.49,47.36 71.63,46.5 4_7SEGMENT1:LD3.11 | 76.37,52.53 66.35,62.55 4_7SEGMENT1:LD3.3
  Bottom 0.152: 4_7SEGMENT1:LD3.3 66.13,62.55 64.73,63.95 61.28,63.95 4_7SEGMENT1:LD2.13 | 4_7SEGMENT1:LED_DRIVER_1.6 94.47,65.03 94.15,64.71 90.06,64.71 80.68,55.33 4_7SEGMENT1:LD3.16
GND  (via drill 0.35)
  Top 0.152: LEDS2:A2.3 55.9,102.75 58.27,105.12 LEDS2:U$1.16 58.27,105.33 59.13,106.2 59.13,110.94 56.76,113.31 56.76,113.74 57.73,114.71 57.73,114.92 57.19,115.46 56.11,115.46 LEDS2:U$1.8 56,115.36 54.71,114.06 54.71,109.75 53.42,108.46 53.42,106.09 52.99,105.66 LEDS2:A1.3 52.99,105.44 v52.12,104.58 | v49.21,107.49 50.08,108.35 LEDS2:A0.3 | POWER1:3.3_STEPDOWN.2 7.83,103.18 8.05,102.96 12.79,102.96 22.92,92.83 POWER1:C4.- | 26.26,61.26 26.48,61.26 MAGNETOMETER1:U$1.2 | 26.26,61.26 26.05,61.26 MAGNETOMETER1:U$1.3 | 26.26,61.26 26.69,60.83 26.91,60.83 MAGNETOMETER1:U$1.12 27.12,60.83 31.65,65.35 31.65,65.57 MAGNETOMETER1:CY1.1 | PRESSURESENSOR1:U$1.2 14.84,61.69 23.89,70.74 PRESSURESENSOR1:CY1.2 | LEDS1:A2.3 109.67,48.76 112.36,51.45 LEDS1:U$1.8 112.36,51.67 112.36,52.75 111.72,53.39 111.5,53.39 110.53,52.42 108.16,52.42 | 108.16,52.42 107.19,51.45 LEDS1:A1.3 | 103.53,53.61 102.34,54.79 102.34,55.01 v104.28,56.95 108.27,60.94 108.27,67.4 107.94,67.72 107.94,69.23 108.48,69.77 109.56,69.77 110.1,69.23 110.1,68.16 109.99,68.05 109.99,61.8 LEDS1:U$1.16 | 103.53,53.61 103.96,53.61 104.39,54.04 LEDS1:A0.3 | v107.94,52.64 108.16,52.42 | POWER1:U1.2 66.67,23.22 67.53,24.08 69.04,24.08 POWER1:R2.2 | POWER1:R3.1 66.99,26.34 59.88,26.34 POWER1:C2.- 59.67,26.34 59.13,26.88 45.55,26.88 MSP1:S1.P$1 | LEDS3:A0.3 25.61,29.79 25.18,29.36 24.75,29.36 23.67,30.44 23.67,49.4 25.18,50.91 MAGNETOMETER1:CY2.1 | 32.73,25.7 32.3,25.27 32.3,24.4 31.86,23.97 LEDS3:A2.3 | 32.73,25.7 33.59,26.56 LEDS3:U$1.8 | LEDS3:U$1.16 31.22,36.9 31.65,37.34 31.65,39.92 33.37,41.65 34.88,41.65 MSP1:R3.P$1
  Top 0.152: v29.6,27.74 28.74,26.88 LEDS3:A1.3 | v32.3,26.13 32.73,25.7 | 103.53,53.61 101.48,51.56 101.48,39.28 82.73,20.52 POWER1:QIRECEIVER.2
  Bottom 0.152: 3_7SEGMENT1:U$1.8 56.43,96.39 56.43,100.27 v52.12,104.58 v49.21,107.49 43.83,102.1 32.4,102.1 POWER1:C3.- 32.3,101.99 24,93.7 | 24,93.7 23.14,92.83 POWER1:C4.- | MSP1:U$1.20 40.49,51.56 38.55,53.5 38.55,58.67 31.65,65.57 MAGNETOMETER1:CY1.1 31.54,65.68 26.48,70.74 24.11,70.74 PRESSURESENSOR1:CY1.2 24,70.85 19.58,75.27 19.58,83.46 19.47,83.57 | 19.47,83.57 19.04,84 POWER1:LIPO.2 19.47,83.57 | 4_7SEGMENT1:LED_DRIVER_1.8 91.03,61.58 91.78,62.34 91.78,63.85 92.32,64.38 93.83,64.38 97.38,60.83 100.4,60.83 v104.28,56.95 104.28,56.3 v107.94,52.64 | POWER1:R3.1 67.1,26.24 69.15,24.19 POWER1:R2.2 | POWER1:QIRECEIVER.2 82.62,20.42 78.96,24.08 69.26,24.08 POWER1:R2.2 | POWER1:C1.- 69.15,16.64 69.15,23.97 POWER1:R2.2 | 34.99,33.13 30.14,28.28 | 30.14,28.28 v29.6,27.74 | 34.99,33.13 34.99,41.54 MSP1:R3.P$1 34.88,41.65 34.67,41.65 25.29,51.02 MAGNETOMETER1:CY2.1 25.18,51.13 14.73,61.58 PRESSURESENSOR1:U$1.2 | 30.14,28.28 v32.3,26.13 | 34.99,33.13 39.08,33.13 45.33,26.88 MSP1:S1.P$1 | 24,93.7 28.31,89.38 28.31,89.17 22.7,83.57 19.47,83.57
  pour Bottom: 40.31,129.4 0.79,129.4 -4.6,124.01 -4.6,3.68 6.18,-7.1 121.13,-7.1 134.6,6.37 134.6,121.32 125.62,130.3 41.2,130.3
LEDS1:N$1
  Top 0.152: LEDS1:U$1.3 107.84,55.98 102.13,50.27 102.13,23.11 103.31,21.93 105.04,21.93 LEDS1:D1.K
LEDS1:N$2
  Top 0.152: LEDS1:U$1.4 108.7,55.12 107.08,53.5 106.01,53.5 104.93,52.42 104.93,40.57 111.5,33.99 114.3,33.99 LEDS1:D2.K
LEDS1:N$3
  Top 0.152: LEDS1:U$1.5 109.78,54.25 110.85,55.33 112.15,55.33 116.46,51.02 116.46,48.22 117.21,47.47 119.58,47.47 120.12,48 LEDS1:D3.K
LEDS1:N$4  (via drill 0.35)
  Top 0.152: v111.93,54.69 110.64,53.39 LEDS1:U$1.6
  Bottom 0.152: v111.93,54.69 115.38,58.13 124.65,58.13 125.4,58.89 125.4,59.97 122.28,63.09 LEDS1:D4.K
LEDS1:N$5
  Top 0.152: LEDS1:U$1.11 114.52,57.27 115.81,57.27 116.24,56.84 116.24,56.41 115.38,55.55 115.38,55.12 115.92,54.58 116.13,54.58 117.21,55.66 117.21,76.35 116.46,77.1 116.46,78.18 117.21,78.93 119.58,78.93 120.12,78.39 LEDS1:D5.K
LEDS1:N$6
  Top 0.152: LEDS1:U$1.12 113.55,58.24 116.13,60.83 116.13,86.26 119.26,89.38 119.26,90.68 117.54,92.4 114.52,92.4 LEDS1:D6.K
LEDS1:N$7
  Top 0.152: LEDS1:U$1.13 112.69,59.1 112.69,88.85 110.42,91.11 110.42,103.61 109.56,104.47 105.25,104.47 LEDS1:D7.K
LEDS1:N$8
  Top 0.152: LEDS1:U$1.14 111.72,60.07 112.15,60.5 112.15,88.95 90.49,110.61 90.49,112.12 92.1,113.74 92.97,113.74 LEDS1:D8.K
LEDS1:N$9
  Top 0.152: LEDS1:U$1.7 111.5,52.31 109.35,50.16 109.35,49.73 109.02,49.4 LEDS1:A2.2
LEDS1:N$10
  Top 0.152: LEDS1:U$1.10 115.27,56.3 114.63,55.66 110.1,55.66 106.54,52.1 LEDS1:A1.2
LEDS1:N$11
  Top 0.152: LEDS1:U$1.9 116.24,55.55 116.57,55.87 116.57,56.95 115.27,58.24 114.41,58.24 113.12,56.95 107.73,56.95 105.79,55.01 104.5,55.01 104.07,54.58 LEDS1:A0.2
LEDS1:N$12
  Top 0.152: LEDS1:D5.A 117.86,77.64 120.34,75.16 122.92,75.16 LEDS1:R5.P$1
LEDS1:N$13
  Top 0.152: LEDS1:D6.A 112.36,91.11 113.33,90.14 117.86,90.14 LEDS1:R6.P$1
LEDS1:N$14
  Top 0.152: LEDS1:D7.A 103.42,102.64 103.96,103.18 109.13,103.18 LEDS1:R7.P$1
LEDS1:N$15
  Top 0.152: LEDS1:D8.A 91.89,111.58 92.75,112.45 95.98,112.45 97.17,113.63 LEDS1:R8.P$1
LEDS1:N$16
  Top 0.152: LEDS1:D1.A 103.42,23.76 103.96,23.22 109.13,23.22 LEDS1:R1.P$2
LEDS1:N$18
  Top 0.152: LEDS1:D2.A 112.36,35.29 113.33,36.26 117.86,36.26 LEDS1:R2.P$2
LEDS1:N$19
  Top 0.152: LEDS1:D3.A 117.86,48.76 120.34,51.24 122.92,51.24 LEDS1:R3.P$2
LEDS1:N$20
  Top 0.152: LEDS1:D4.A 119.8,63.2 123.57,66.97 124,66.97 LEDS1:R4.P$2
LEDS2:N$1
  Top 0.152: LEDS2:U$1.3 60.53,111.05 65.38,115.89 78.96,115.89 79.6,116.54 79.6,118.91 78.96,119.56 LEDS2:D1.K
LEDS2:N$2
  Top 0.152: LEDS2:U$1.4 59.56,112.02 65.06,117.51 65.06,120.31 63.87,121.5 LEDS2:D2.K
LEDS2:N$3
  Top 0.152: LEDS2:U$1.5 58.7,112.88 58.7,114.82 53.96,119.56 48.78,119.56 LEDS2:D3.K
LEDS2:N$4
  Top 0.152: LEDS2:U$1.6 57.73,113.85 58.05,114.17 58.05,115.03 56.65,116.43 50.4,116.43 47.81,113.85 34.67,113.85 LEDS2:D4.K
LEDS2:N$5
  Top 0.152: LEDS2:U$1.11 53.74,109.86 53.74,110.94 53.09,111.58 52.88,111.58 50.94,109.64 50.94,108.35 39.41,96.82 28.42,96.82 22.49,102.75 22.49,104.47 LEDS2:D5.K
LEDS2:N$6
  Top 0.152: LEDS2:U$1.12 54.71,108.67 53.96,107.92 53.96,105.55 43.5,95.1 27.12,95.1 21.84,89.82 14.95,89.82 13.22,91.54 13.22,92.4 LEDS2:D6.K
LEDS2:N$7
  Top 0.152: LEDS2:U$1.13 55.57,107.81 54.28,106.52 54.28,105.23 40.49,91.43 38.76,91.43 38.65,91.54 37.79,91.54 17.42,71.17 17.42,70.31 16.78,69.66 8.16,69.66 3.31,74.51 3.31,75.81 5.79,78.29 7.29,78.29 LEDS2:D7.K
LEDS2:N$8
  Top 0.152: LEDS2:U$1.14 56.43,106.95 14.62,65.14 11.17,65.14 9.13,63.09 9.13,62.66 8.48,62.01 6.76,62.01 5.57,63.2 LEDS2:D8.K
LEDS2:N$9
  Top 0.152: LEDS2:U$1.7 56.87,114.49 56.43,114.06 56.43,108.24 57.4,107.27 57.4,107.06 55.68,105.33 55.68,103.61 55.36,103.29 LEDS2:A2.2
LEDS2:N$10
  Top 0.152: LEDS2:U$1.10 52.88,110.51 52.88,106.63 52.45,106.2 LEDS2:A1.2
LEDS2:N$11
  Top 0.152: LEDS2:U$1.9 52.02,111.37 49.65,109 LEDS2:A0.2
LEDS2:N$12
  Top 0.152: LEDS2:D5.A 24.32,102.86 23.89,103.29 23.89,108.46 LEDS2:R5.P$1
LEDS2:N$13
  Top 0.152: LEDS2:D6.A 15.48,91.22 14.51,92.19 14.51,95.42 13.44,96.5 LEDS2:R6.P$1
LEDS2:N$14
  Top 0.152: LEDS2:D7.A 9.77,77.75 6.54,80.98 LEDS2:R7.P$1
LEDS2:N$15
  Top 0.152: LEDS2:R8.P$1 3.63,67.08 7.4,63.31 7.83,63.31 LEDS2:D8.A
LEDS2:N$16
  Top 0.152: LEDS2:D1.A 78.2,117.3 75.72,119.77 75.72,122.36 LEDS2:R1.P$2
LEDS2:N$18
  Top 0.152: LEDS2:D2.A 63.76,119.24 59.99,123.01 59.99,123.44 LEDS2:R2.P$2
LEDS2:N$19
  Top 0.152: LEDS2:R3.P$2 44.58,120.53 47.92,117.19 49.21,117.19 LEDS2:D3.A
LEDS2:N$20
  Top 0.152: LEDS2:R4.P$2 30.46,113.52 32.4,111.58 35.85,111.58 LEDS2:D4.A
LEDS3:N$1
  Top 0.152: LEDS3:U$1.3 28.95,31.19 26.58,28.82 24.86,28.82 11.17,42.51 11.17,49.19 10.31,50.05 9.23,50.05 7.4,48.22 LEDS3:D1.K
LEDS3:N$2
  Top 0.152: LEDS3:U$1.4 29.92,30.22 28.95,29.25 27.45,29.25 26.69,28.5 24.11,28.5 16.02,36.58 14.95,36.58 13.33,34.96 13.33,34.1 LEDS3:D2.K
LEDS3:N$3
  Top 0.152: LEDS3:U$1.5 30.79,29.36 30.36,28.93 27.77,28.93 22.49,23.65 22.49,21.93 LEDS3:D3.K
LEDS3:N$4
  Top 0.152: LEDS3:U$1.6 31.76,28.39 29.82,26.45 29.82,17.61 34.67,12.77 LEDS3:D4.K
LEDS3:N$5
  Top 0.152: LEDS3:U$1.11 35.74,32.38 37.04,32.38 37.58,31.84 37.58,31.62 36.61,30.65 36.61,22.25 48.35,10.5 49.86,10.5 50.61,9.75 50.61,8.67 48.78,6.84 LEDS3:D5.K
LEDS3:N$6  (via drill 0.35)
  Top 0.152: v35.42,31.19 34.77,31.84 34.77,33.13 LEDS3:U$1.12
  Bottom 0.152: v35.42,31.19 61.82,4.79 63.76,4.79 LEDS3:D6.K
LEDS3:N$7  (via drill 0.35)
  Top 0.152: v39.84,30.01 39.84,30.44 35.74,34.53 34.45,34.53 34.02,34.1 LEDS3:U$1.13
  Bottom 0.152: v39.84,30.01 61.28,8.56 77.02,8.56 78.85,6.73 LEDS3:D7.K
LEDS3:N$8
  Top 0.152: LEDS3:U$1.14 33.05,35.07 35.64,35.07 40.49,30.22 40.49,18.8 48.46,10.83 87.04,10.83 90.16,7.7 91.24,7.7 93.07,9.53 93.07,12.55 LEDS3:D8.K
LEDS3:N$9
  Top 0.152: LEDS3:U$1.7 32.73,27.42 31.65,26.34 31.65,24.83 31.33,24.51 LEDS3:A2.2
LEDS3:N$10
  Top 0.152: LEDS3:U$1.10 36.5,31.41 34.45,29.36 31.65,29.36 30.68,28.39 29.39,28.39 28.31,27.31 LEDS3:A1.2
LEDS3:N$11
  Top 0.152: LEDS3:U$1.9 37.47,30.65 37.9,31.09 37.9,31.95 35.64,34.21 34.77,34.21 32.62,32.05 28.95,32.05 27.66,30.76 25.72,30.76 25.29,30.33 LEDS3:A0.2
LEDS3:N$12
  Top 0.152: LEDS3:R5.P$1 44.58,5.87 47.92,9.21 49.21,9.21 LEDS3:D5.A
LEDS3:N$13
  Top 0.152: LEDS3:D6.A 63.87,7.27 59.99,3.39 59.99,2.96 LEDS3:R6.P$1
LEDS3:N$14
  Top 0.152: LEDS3:D7.A 78.2,9.1 75.72,6.62 75.72,4.04 LEDS3:R7.P$1
LEDS3:N$15
  Top 0.152: LEDS3:R8.P$1 90.7,9.1 91.67,10.07 91.67,14.81 LEDS3:D8.A
LEDS3:N$16
  Top 0.152: LEDS3:D1.A 9.77,48.65 6.54,45.42 LEDS3:R1.P$2
LEDS3:N$18
  Top 0.152: LEDS3:D2.A 15.48,35.18 14.51,34.21 14.51,30.98 13.44,29.9 LEDS3:R2.P$2
LEDS3:N$19
  Top 0.152: LEDS3:D3.A 24.32,23.54 23.89,23.11 23.89,17.94 LEDS3:R3.P$2
LEDS3:N$20
  Bottom 0.152: LEDS3:R4.P$2 36.93,9.21 35.96,10.18 35.96,14.71 LEDS3:D4.A
MAGNETOMETER1:N$3
  Top 0.152: MAGNETOMETER1:U$1.4 25.29,61.37 25.18,61.26 24.97,61.26 24.97,59.53 26.37,58.13 31.54,58.13 MAGNETOMETER1:CY1.2
MSP1:N$1
  Top 0.152: MSP1:S1.P$2 32.94,39.49 34.67,39.49 36.17,41 36.17,43.59 36.82,44.23 MSP1:U$1.2 36.82,44.45 36.82,54.15 37.25,54.58 MSP1:R1.P$1
MSP1:N$2
  Top 0.152: MSP1:U$1.3 38.65,42.4 39.08,41.97 39.08,37.66 40.38,36.37 MSP1:R3.P$2 40.38,36.15 42.1,34.43 MSP1:R2.P$1
N$1
  Top 0.152: MSP1:R2.P$2 47.71,29.04 49.11,27.64 73.68,27.64 82.08,19.23 83.37,19.23 94.8,30.65 99.54,30.65 POWER1:D1.C
  Bottom 0.152: 16.89,92.19 21.84,92.19 24.75,89.28 26.48,89.28 POWER1:C4.+ | 16.89,92.19 16.02,92.19 6.11,102.1 6.11,104.69 5.89,104.9 POWER1:3.3_STEPDOWN.1 | POWER1:PMOS.3 108.05,5.76 107.84,5.98 107.84,22.36 99.65,30.55 POWER1:D1.C | 16.89,92.19 16.89,73 15.16,71.28 15.16,65.68 20.66,60.18 20.66,56.3 24.75,52.21 26.05,52.21 47.6,30.65 47.6,29.15 MSP1:R2.P$2
POWER1:N$2
  Top 0.152: 70.23,23.54 70.23,24.62 69.58,25.27 68.72,25.27 68.5,25.05 67.21,25.05 66.03,23.86 POWER1:U1.3 | 70.23,23.54 68.29,21.6 65.7,21.6 64.41,22.9 56.43,22.9 POWER1:C2.+ | 70.23,23.54 71.31,23.54 77.45,17.4 91.03,17.4 92.75,15.67 92.75,15.46 100.62,7.59 106.01,7.59 106.22,7.38 POWER1:PMOS.2
  Bottom 0.152: POWER1:LIPO.1 20.76,82.27 60.96,42.08 60.96,29.36 56.33,24.73 56.33,23 POWER1:C2.+
POWER1:N$3
  Top 0.152: POWER1:U1.1 67.1,22.57 66.78,22.25 65.49,22.25 62.79,24.94 47.06,24.94 43.72,21.6 43.72,20.52 POWER1:LD1.CR
  Bottom 0.152: POWER1:LD1.CX 40.27,16.86 40.7,17.29 42.86,17.29 43.72,18.15 43.72,20.31 POWER1:LD1.CR
POWER1:N$4
  Top 0.152: 64.52,16.75 64.52,14.17 65.59,13.09 POWER1:C1.+ | 64.52,16.75 64.52,21.49 64.09,21.93 POWER1:U1.4 | 64.52,16.75 54.82,16.75 POWER1:R1.1
  Bottom 0.152: 94.26,19.55 104.5,9.32 POWER1:PMOS.1 | 94.26,19.55 94.26,25.16 POWER1:D1.A | 94.26,19.55 85.42,19.55 84.56,18.69 POWER1:QIRECEIVER.1 84.34,18.69 78.63,12.98 65.7,12.98 POWER1:C1.+ | POWER1:R3.2 59.88,33.24 54.71,28.07 54.71,16.64 POWER1:R1.1
POWER1:N$6
  Top 0.152: POWER1:U1.5 65.49,20.74 68.4,17.83 75.29,17.83 76.15,16.97 POWER1:R2.1
POWER1:N$7
  Top 0.152: POWER1:LD1.A 41.99,18.58 42.42,19.02 44.58,19.02 47.6,22.03 47.6,23.76 POWER1:R1.2
PRESSURESENSOR1:N$1
  Top 0.152: PRESSURESENSOR1:U$1.3 14.62,59.32 11.71,62.23 11.71,63.74 PRESSURESENSOR1:R1.P$1
SCL  (via drill 0.35)
  Top 0.152: 26.8,61.8 26.91,61.69 26.91,61.47 MAGNETOMETER1:U$1.1 | 26.8,61.8 24.43,61.8 23.35,60.72 13.65,60.72 13.01,61.37 13.01,62.44 14.62,64.06 PRESSURESENSOR1:U$1.1 | LEDS3:U$1.15 32.19,35.93 33.05,35.93 33.16,36.04 38.76,36.04 41.67,33.13 42.75,33.13 44.47,34.86 44.47,35.29 49.86,40.68 51.15,40.68 MSP1:U$1.14 51.26,40.78 51.26,47.68 32.08,66.86 | 26.8,61.8 30.57,65.57 30.57,66.22 31.22,66.86 32.08,66.86 | v58.48,107.06 57.51,106.09 LEDS2:U$1.15 | LEDS1:U$1.15 110.85,60.94 110.85,68.91 107.51,72.25 101.91,72.25 4_7SEGMENT1:LED_DRIVER_1.2 | 32.08,66.86 55.36,90.14 55.36,97.25 65.16,107.06 67.1,107.06 3_7SEGMENT1:U$1.2
  Bottom 0.152: v58.48,107.06 67.1,107.06 3_7SEGMENT1:U$1.2 67.32,107.06 69.47,104.9 80.03,104.9 102.56,82.38 102.56,80.01 101.8,79.26 101.8,72.36 4_7SEGMENT1:LED_DRIVER_1.2
SDA  (via drill 0.35)
  Top 0.152: v27.77,60.61 27.45,60.29 27.01,60.29 MAGNETOMETER1:U$1.11 | LEDS3:U$1.2 28.2,32.16 31.22,35.18 31.22,36.04 34.34,39.17 34.77,39.17 37.25,41.65 37.25,42.51 38.65,43.91 45.77,43.91 47.17,42.51 49.32,42.51 MSP1:U$1.15 | LEDS2:U$1.2 61.5,110.08 67.75,110.08 68.93,108.89 3_7SEGMENT1:U$1.1 | LEDS1:U$1.2 107.08,56.95 110.1,59.97 110.75,59.97 111.82,61.04 111.82,68.37 106.11,74.08 103.74,74.08 4_7SEGMENT1:LED_DRIVER_1.1 | v66.24,108.57 55.03,97.36 55.03,94.56 22.27,61.8 PRESSURESENSOR1:U$1.7
  Bottom 0.152: PRESSURESENSOR1:U$1.7 22.38,61.69 26.69,61.69 v27.77,60.61 30.57,57.81 30.57,57.59 45.66,42.51 49.32,42.51 MSP1:U$1.15 | 4_7SEGMENT1:LED_DRIVER_1.1 103.63,74.19 104.28,74.84 104.28,81.09 80.14,105.23 72.81,105.23 69.15,108.89 3_7SEGMENT1:U$1.1 68.93,108.89 66.56,108.89 v66.24,108.57

## Text on the board
tPlace: Dan Sturm & Robert Barlow | Coral Sensor Rev 1.1